# Altium PCB PCB.PcbDoc
Units mm, origin at the board's own origin, x right, y up, seen from the top; angles counter-clockwise.
Board outline 140.25 x 80.25 mm, 2 copper layers (Top Layer, Bottom Layer); 46 components, 44 nets, 145 pads, 16 vias.
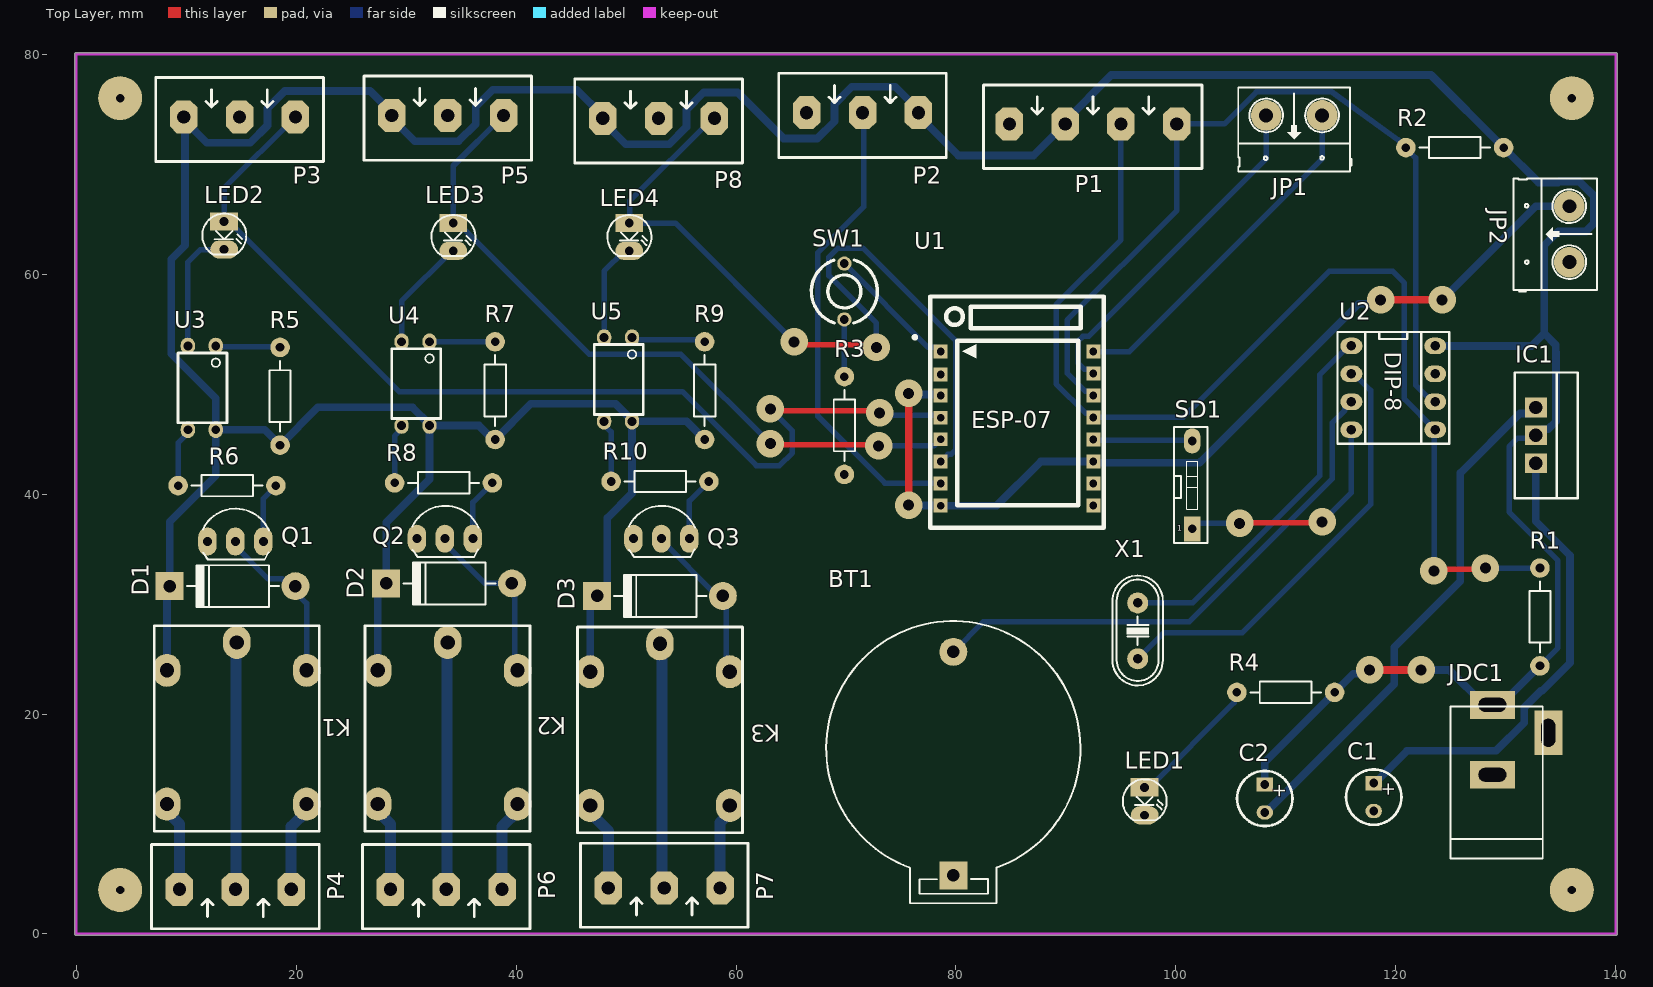
[diagram p0: Top Layer view]
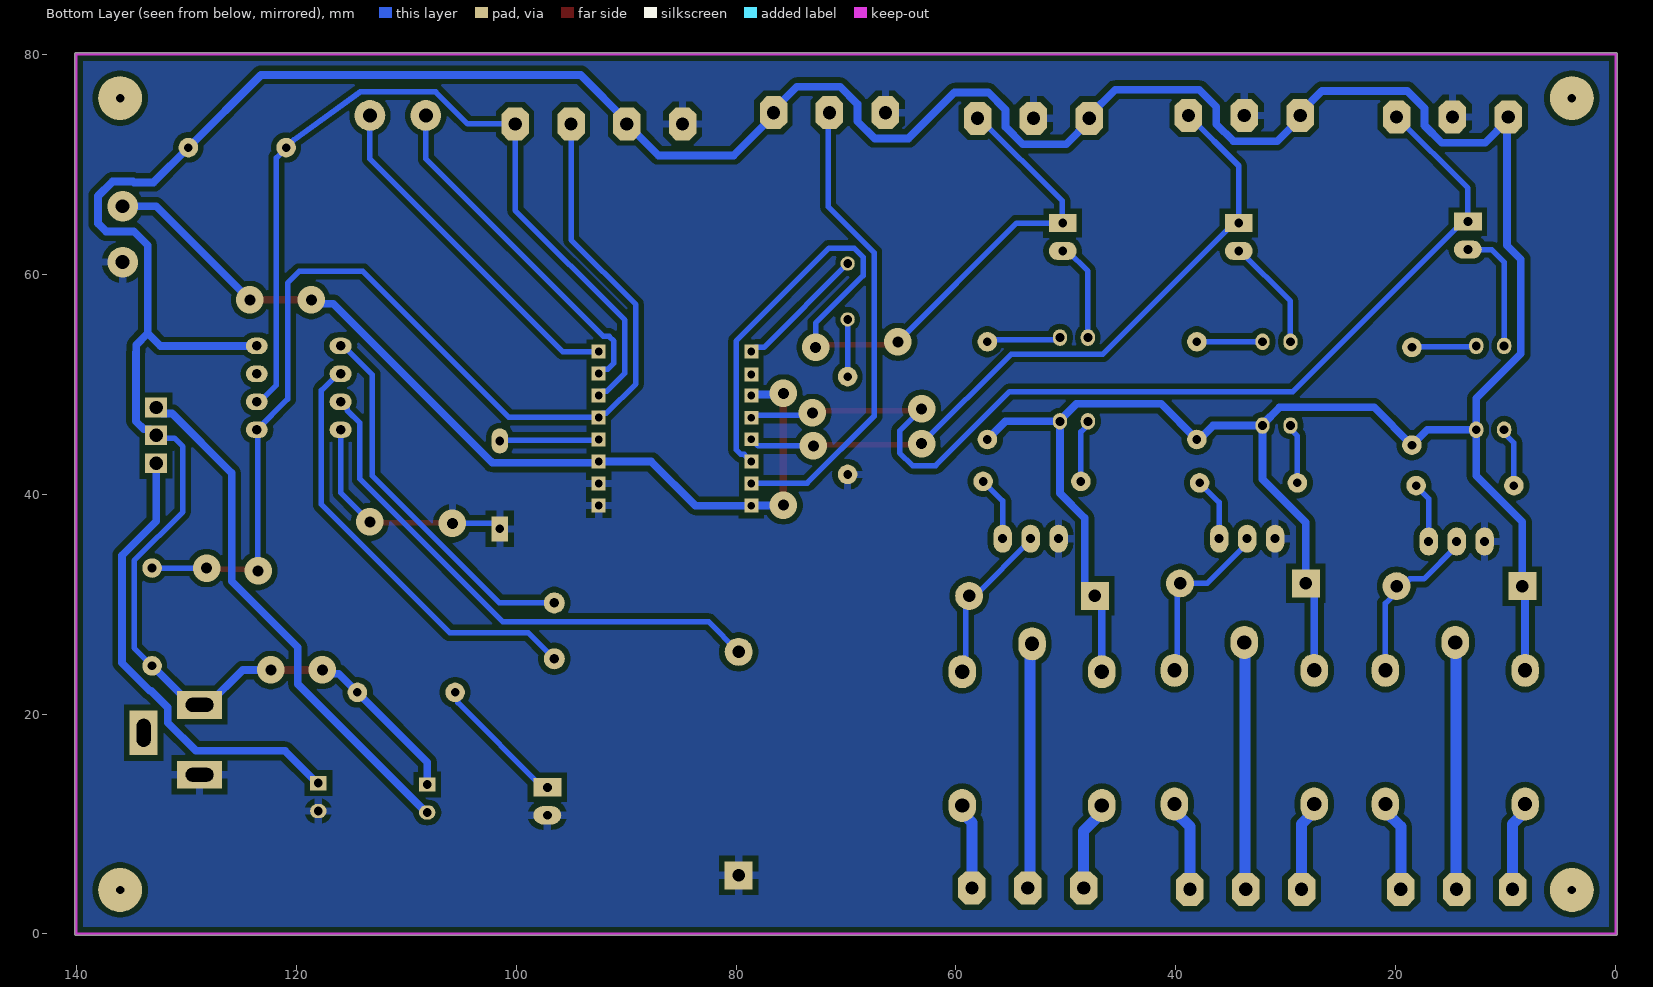
[diagram p1: Bottom Layer view, seen from below]

## Layer stack, top to bottom
Top Solder: solder mask 0.0102, Solder Resist, Dk 3.5
Top Layer: signal copper 0.0356
Dielectric 1: dielectric 0.32, FR-4, Dk 4.8
Bottom Layer: signal copper 0.0356
Bottom Solder: solder mask 0.0102, Solder Resist, Dk 3.5

## Board outline
-0.127,0 ccw(c0,0) 0,-0.127 140,-0.127 ccw(c140,0) 140.127,0 140.127,80 ccw(c140,80) 140,80.127 0,80.127 ccw(c0,80) -0.127,80

## Design rules (kind name [scope] priority, off if disabled: settings)
Clearance [All] p1: gap=0.5 ignorepadtopadclearanceinfootprint=FALSE
PolygonConnect [All] p1: connectstyle=Relief reliefconductorwidth=0.7 reliefentries=4 polygonreliefangle="90 Angle" airgapwidth=0.5
RoutingVias [All] p1: holewidth=1 width=2.5 viastyle="Through Hole" minholewidth=1 minwidth=2.5 maxholewidth=1 maxwidth=2.5
SolderMaskExpansion [All] p1: expansion=0.102 istentingtop=FALSE
UnRoutedNet [All] p1 off:
Width [All] p1: maxlimit=1 minlimit=0.5 preferedwidth=0.7
29 further rules are at their usual default settings.

## Components (designator, comment, footprint, x,y, rotation, side; value= is the part's Value field where it differs from the comment)
BT1 "PIN 3V" PIN3V 79.756,5.334 r90 top
C1 "Cap Pol 5mm" C5mm 117.983,12.446 r270 top
C2 "Cap Pol 5mm" C5mm 108.077,12.319 r270 top
D1 "1N4007" D2A 8.509,31.623 r0 top
D2 "1N4007" D2A 28.194,31.877 r0 top
D3 "1N4007" D2A 47.371,30.734 r0 top
IC1 "LM317" TO-220 132.715,45.339 r270 top
JDC1 "Jac DC" DC-IN 131.318,17.653 r90 top
JP1 "Header 2_1" HED2 113.284,74.422 r180 top value="Header 2"
JP2 "Header 2_1" HED2 135.763,61.087 r90 top value="Header 2"
K1 "Relay-SPDT" RELAY5PIN-10A 14.605,26.511 r180 top
K2 "Relay-SPDT" RELAY5PIN-10A 33.782,26.511 r180 top
K3 "Relay-SPDT" RELAY5PIN-10A 53.086,26.384 r180 top
LED1 "LED" LED-3 97.155,13.335 r270 top value="LED 3 ly Single Colour"
LED2 "LED" LED-3 13.462,64.77 r270 top value="LED 3 ly Single Colour"
LED3 "LED" LED-3 34.29,64.643 r270 top value="LED 3 ly Single Colour"
LED4 "LED" LED-3 50.292,64.643 r270 top value="LED 3 ly Single Colour"
P1 "Header 4 - M" "Medium - Header 4" 100.076,73.66 r180 top
P2 "Header 3 - M" "Medium - Header 3" 76.581,74.676 r180 top
P3 "Header 3 - M" "Medium - Header 3" 19.939,74.295 r180 top
P4 "Header 3 - M" "Medium - Header 3" 9.398,4.064 r0 top
P5 "Header 3 - M" "Medium - Header 3" 38.862,74.422 r180 top
P6 "Header 3 - M" "Medium - Header 3" 28.575,4.064 r0 top
P7 "Header 3 - M" "Medium - Header 3" 48.387,4.191 r0 top
P8 "Header 3 - M" "Medium - Header 3" 58.039,74.168 r180 top
Q1 "C1815" QTO-92 14.478,35.687 r0 top
Q2 "C1815" QTO-92 33.528,35.941 r0 top
Q3 "C1815" QTO-92 53.213,35.941 r0 top
R1 "2.2k" R1/4W 133.096,24.384 r90 top value="R1/4W - 1K"
R2 "2.2k" R1/4W 120.904,71.501 r0 top value="R1/4W - 1K"
R3 "1k" R1/4W 69.85,41.783 r90 top value="R1/4W - 1K"
R4 "1k" R1/4W 114.427,21.971 r180 top value="R1/4W - 1K"
R5 "1k" R1/4W 18.542,44.45 r90 top value="R1/4W - 1K"
R6 "1k" R1/4W 9.271,40.767 r0 top value="R1/4W - 1K"
R7 "1k" R1/4W 38.1,44.958 r90 top value="R1/4W - 1K"
R8 "1k" R1/4W 28.956,41.021 r0 top value="R1/4W - 1K"
R9 "1k" R1/4W 57.15,44.958 r90 top value="R1/4W - 1K"
R10 "1k" R1/4W 48.641,41.148 r0 top value="R1/4W - 1K"
SD1 "SW - DIP2" DIP2/W0.3K 101.473,36.83 r0 top
SW1 "SW" "BUTTON 2PIN TRON" 69.85,55.88 r90 top value="SW chip 2 pin"
U1 "ESP 12" ESP12_small 85.523,47.46 r0 top
U2 "DS1307" DIP.100/8/W.300/L.400 119.761,49.657 r270 top
U3 "Opto Isolator" PhotoCoupler 12.7,53.467 r180 top
U4 "Opto Isolator" PhotoCoupler 32.131,53.848 r180 top
U5 "Opto Isolator" PhotoCoupler 50.546,54.229 r180 top
X1 "4Mhz" XT2 96.52,27.559 r270 top

## Footprints (in the part's own frame and the unit in brackets; to place one, negate y for a bottom-side part, rotate by r counter-clockwise, add the part's x,y. Pads: shape width x height; smd on the part's side, far side on the other; paste and mask are expansions set on the pad)
"BUTTON 2PIN TRON" [mm] "PIN TO PIN 5.08, W=6MM"
  round 1.3 hole 0.8: 1(0,0) 2(5.08,0)
  silkscreen extent -0.33,-3 5.4,3, body extent -0.74,-3.02 5.72,3.18, height 4.4
C5mm [mm]
  rect 1.3x1.5 hole 0.8: 1(-1.27,0)
  oval 1.3x1.5 hole 0.8: 2(1.27,0)
  silkscreen extent -2.51,-2.51 2.51,2.51, body extent -2.5,-2.5 2.49,2.5, height 11.01
D2A [mil] "Diode 2A, W 150mil, L 450mil"
  round 100 hole 45: 1(450,0)
  rect 100x100 hole 45: 2(0,0)
  silkscreen extent 61,-75 391,75, body extent 5,-47 435,54, height 100
DC-IN [mil] "Jac DC input"
  rect 100x160 hole 50 slot 100 at 90 deg: 1(125,100) 2(-125,100)
  rect 160x100 hole 50 slot 100 at 0 deg: 3(25,-100)
  silkscreen extent -425,-80 120,250, body extent -410,-105 134,269, height 434
DIP2/W0.3K [mil] "2 PIN, W 200mil , L 450mil,Pin to pin 100mil"
  rect 60x90 hole 31: 1(0,0)
  oval 60x90 hole 31: 2(0,315)
  silkscreen extent -65,-50 55,365, body extent -73,-52 65,362, height 130
DIP.100/8/W.300/L.400 [mm]
  oval 1.5x2 hole 0.864: 1(-3.81,-3.81) 2(-1.27,-3.81) 3(1.27,-3.81) 4(3.81,-3.81) 5(3.81,3.81) 6(1.27,3.81) 7(-1.27,3.81) 8(-3.81,3.81)
  silkscreen extent -5.08,-5.08 5.08,5.08, body extent -5.4,-3.88 5.4,3.88, height 4.5
ESP12_small [mm]
  rect 1.27x1.27 hole 0.71: 1(-6.91,5.499) 2(-6.91,3.416) 3(-6.91,1.511) 4(-6.91,-0.521) 5(-6.91,-2.476) 6(-6.91,-4.508) 7(-6.91,-6.49) 8(-6.91,-8.522) 9(6.963,-8.496) 10(6.963,-6.49) 11(6.963,-4.508) 12(6.963,-2.502) 13(6.963,-0.495) 14(6.963,1.511) 15(6.963,3.492) 16(6.963,5.499)
  silkscreen extent -9.41,-10.5 7.92,10.5, body extent -8.12,-9.97 8.13,14.03, height 9
HED2 [mil] "Header 2, 2 pin, hight 300mil, Pin to Pin 200, Colour Green"
  round 110 hole 50: 1(0,0) 2(200,0)
  silkscreen extent -106,-100 300,200, body extent -92,-90 302,205, height 394
LED-3 [mil] "LED 2 PIN, 3ly Only colour"
  rect 65x100 hole 32: 1(0,0)
  oval 65x100 hole 32: 2(100,0)
  silkscreen extent -29,-78 118,79, body extent -29,-75 109,75, height 256
"Medium - Header 3" [mm]
  oct 2.5x3 hole 1.2: 1(0,0) 2(5.08,0) 3(10.16,0)
  silkscreen extent -2.54,-3.58 12.7,4.06, body extent -2.42,-3.51 12.58,3.99, height 10
"Medium - Header 4" [mm]
  oct 2.5x3 hole 1.2: 1(0,0) 2(5.08,0) 3(10.147,0) 4(15.215,0)
  silkscreen extent -2.29,-3.53 17.58,4.06, body extent -2.36,-3.43 17.64,4.07, height 10
PhotoCoupler [mm] "Opto quang"
  oval 1.3x1.5 hole 0.8: 1(0,0) 2(2.54,0) 3(2.54,7.62) 4(0,7.62)
  silkscreen extent -1.02,0.63 3.43,6.98, body extent -1.53,-0.19 4.01,7.81, height 4.31
PIN3V [mil] "Socket PIN 3V"
  rect 100x100 hole 45: 1(0,0)
  round 100 hole 45: 2(800,0)
  silkscreen extent -100,-455 910,455, body extent -128,-447 1002,449, height 278
QTO-92 [mil] "TO-92"
  oval 66x100 hole 32: 1(-100,0) 2(0,0) 3(100,0)
  silkscreen extent -117,-65 120,118, body extent -109,-66 109,95, height 245
R1/4W [mil] "R 1/4W, 2 Pin, 350mil"
  round 70 hole 31: 1(0,0) 2(350,0)
  silkscreen extent 48,-38 302,38, body extent -40,-47 386,47, height 111
RELAY5PIN-10A [mm]
  oval 2.5x3 hole 1.3: 1(0,0) 2(-6.35,14.7) 3(6.35,14.7) 4(-6.35,2.54) 5(6.35,2.54)
  silkscreen extent -7.49,-1.52 7.51,17.18, body extent -7.49,-1.52 7.49,17.15, height 16
TO-220 [mm]
  rect 1.8x2 hole 1.2: 1(-2.54,0) 2(0,0) 3(2.54,0)
  silkscreen extent -5.72,-1.91 5.71,3.81, body extent -4.92,-2.13 4.98,2.37, height 8.08
XT2 [mil] "Footpin for Crystal 2 pin"
  round 75 hole 34: 1(-100,0) 2(100,0)
  silkscreen extent -198,-90 195,90, body extent -233,-93 213,90, height 138

## Part data
BT1: "Battery 3VDC"
C1 C2: "Polarized Capacitor (Axial)", LatestRevisionDate=17-Jul-2002, LatestRevisionNote="Re-released for DXP Platform.", PackageReference=POLAR0.8, Published=8-Jun-2000, Publisher="Altium Limited"
D1 D2 D3: library part D1A, "Diode 1A"
IC1: library part LM317_1, Contact Email=bien-nb@thanglongie.com, Creator="Nguyen Ba Bien"
JDC1: library part DCIN, "Jac DC input"
JP1 JP2: "Header, 2-Pin", Manufacturer="Generic Components", Class=Connector
K1 K2 K3: "Single-Pole Dual-Throw Relay", LatestRevisionDate=17-Jul-2002, LatestRevisionNote="Re-released for DXP Platform.", PackageReference=MODULE5B, Published=24-Mar-1999, Publisher="Altium Limited"
LED1 LED2 LED3 LED4: "LED Single colour Green and Red"
P1 P2 P3 P4 P5 P6 P7 P8: "Header, 3-Pin, Medium", LatestRevisionDate=17-Jul-2002, LatestRevisionNote="Re-released for DXP Platform.", Publisher="Altium Limited"
Q1 Q2 Q3: "NPN 600mW, ECB"
R1 R2 R3 R4 R5 R6 R7 R8 R9 R10: library part R1/4W, "Resistor 1/4W"
SD1: library part SWDIP-1, "DIP Switch, 2 Position, SPST"
SW1: library part SW2, "Switch button 2 pin"
U1: library part ESP_12, "ESP-12 Wi-Fi Module by AI-Thinker", IC=ESP8266-EX, Vendor=Ai-thinker
U2: "64 X 8 Serial Real-Time Clock"
U3 U4 U5: "4-Pin Phototransistor Optocoupler", DatasheetDocument=Nov-2003, LatestRevisionDate=04-Mar-2005, LatestRevisionNote="Sch pins 3 & 4 Swapped.", PackageReference=DIP-4, Published=24-Mar-1999, Publisher="Altium Limited"
X1: library part XT2, "Crystal For all Crystal 2pin."

## Free pads (board coordinates)
  round 4 hole 0.762: 19(4,4) 20(136,4) 21(136,76) 22(4,76)

## Via types
v1: diameter 2.5, hole 1, Top Layer to Bottom Layer, 16 vias

## Nets (pads, with @x,y where several pads share a name; then routed paths per layer and width w, separated by ;. In a path a pad name is that pad's centre, name@x,y a point inside that pad or via, vN(x,y) a via of type N, cw(c..) or ccw(c..) an arc to the next point about the centre after c; other vN are vias at no path point)
3.3: C1.1 IC1.3 | length 42.6
  Bottom Layer w0.7: C1.1 118.083,13.716 121.017,16.65 129.104,16.65 131.66,19.206 131.66,20.594 133.195,22.129 133.3,22.129 135.835,24.664 135.835,34.409 132.715,37.529 IC1.3
CB: K1.3 P4.1 | length 8.2
  Bottom Layer w1: K1.3 8.255,11.155 9.398,10.012 P4.1
CB1: K3.3 P7.1 | length 8.2
  Bottom Layer w1: K3.3 46.736,11.028 48.387,9.377 P7.1
CB2: K2.3 P6.1 | length 8.2
  Bottom Layer w1: K2.3 27.432,11.155 28.575,10.012 P6.1
CK: K1.2 P4.3 | length 8.3
  Bottom Layer w1: P4.3 19.558,9.758 20.955,11.155 K1.2
CK1: K3.2 P7.3 | length 7.9
  Bottom Layer w1: P7.3 58.547,10.139 59.436,11.028 K3.2
CK2: K2.2 P6.3 | length 8.3
  Bottom Layer w1: P6.3 38.735,9.758 40.132,11.155 K2.2
COM: K1.1 P4.2 | length 22.5
  Bottom Layer w1: P4.2 14.541,4.127 14.541,26.447 K1.1
COM1: K3.1 P7.2 | length 22.4
  Bottom Layer w1: K3.1 53.276,26.193 53.276,4.381 P7.2
COM2: K2.1 P6.2 | length 22.5
  Bottom Layer w1: P6.2 33.718,4.127 33.718,26.447 K2.1
Ctrl_relay1: LED2.1 P3.1 U1.4 | length 94.2
  Top Layer w0.5: v1(63.119,47.752) 63.307,47.564 72.862,47.564 v1(73.05,47.375)
  Bottom Layer w0.5: P3.1 13.462,67.818 LED2.1 13.906,64.77 29.368,49.309 55.117,49.309 61.849,42.577 63.947,42.577 65.119,43.749 65.119,45.752 v1(63.119,47.752) ; v1(73.05,47.375) 73.277,47.149 78.403,47.149 U1.4
Ctrl_relay2: LED3.1 P5.1 U1.5 | length 64.6
  Top Layer w0.5: v1(63.119,44.577) 63.219,44.477 72.875,44.477 v1(72.976,44.376)
  Bottom Layer w0.5: P5.1 34.29,69.85 LED3.1 34.734,64.643 46.648,52.729 54.967,52.729 v1(63.119,44.577) ; v1(72.976,44.376) 72.981,44.371 78.001,44.371 U1.5
Ctrl_relay3: LED4.1 P8.1 U1.6 | length 77.1
  Top Layer w0.5: v1(65.278,53.848) 65.532,53.594 72.517,53.594 v1(72.771,53.34)
  Bottom Layer w0.5: P8.1 57.842,74.168 50.336,66.662 50.336,64.687 LED4.1 54.483,64.643 v1(65.278,53.848) ; v1(72.771,53.34) 72.771,55.55 68.45,59.871 68.45,61.54 69.27,62.36 71.543,62.36 79.998,53.905 79.998,44.038 79.559,43.598 79.26,43.598 U1.6
GND: BT1.1 C1.2 JDC1.2 JP2.1 LED1.2 P1.4 P2.3 P3.2 P5.2 P8.2 Q1.1 Q2.1 Q3.1 R3.1 SD1.1 U1.9 U1.10 U2.4 | length 21.6
  Top Layer w0.5: v1(105.791,37.338) 105.855,37.401 113.221,37.401 v1(113.284,37.465)
  Bottom Layer w0.5: SD1.1 101.981,37.338 v1(105.791,37.338) ; v1(113.284,37.465) 115.951,40.132 U2.4
NetBT1_2: BT1.2 U2.3 | length 48.7
  Bottom Layer w0.5: BT1.2 82.499,28.397 101.219,28.397 114.201,41.378 114.201,46.468 115.35,47.617 115.35,47.765 115.951,48.366 U2.3
NetC2_2: C2.2 IC1.1 | length 47.6
  Bottom Layer w0.7: C2.2 108.177,11.049 119.858,22.73 119.858,26.084 125.857,32.082 125.857,41.907 131.279,47.329 132.165,47.329 IC1.1
NetD1_1: D1.1 K1.4 Q1.2 | length 15.5
  Bottom Layer w0.5: Q1.2 14.478,35.255 17.456,32.277 18.733,32.277 19.387,31.623 D1.1 19.939,31.071 20.955,30.055 K1.4
NetD2_1: D2.1 K2.4 Q2.2 | length 16.1
  Bottom Layer w0.5: Q2.2 33.528,35.509 37.16,31.877 D2.1 39.878,31.623 39.878,24.225 K2.4
NetD3_1: D3.1 K3.4 Q3.2 | length 15
  Bottom Layer w0.5: Q3.2 53.213,35.803 58.282,30.734 D3.1 59.118,30.416 59.118,24.161 K3.4
NetJP1_1: JP1.1 U1.16 | length 32
  Bottom Layer w0.5: U1.16 95.758,52.959 113.284,70.485 JP1.1
NetJP1_2: JP1.2 U1.15 | length 31.7
  Bottom Layer w0.5: U1.15 92.101,51.337 91.665,51.337 91.101,51.901 91.101,53.905 91.54,54.344 92.063,54.344 108.204,70.485 JP1.2
NetJP2_2: JP2.2 U1.3 U1.8 U1.11 | length 84.6
  Top Layer w0.7: v1(75.692,38.989) v1(75.692,49.149) ; v1(118.618,57.658) v1(124.206,57.658)
  Bottom Layer w0.7: v1(75.692,38.989) 75.717,38.964 78.588,38.964 U1.8 83.685,38.938 87.699,42.951 U1.11 92.599,42.838 102.141,42.838 102.254,42.951 102.26,42.951 116.623,57.314 118.274,57.314 v1(118.618,57.658) ; v1(75.692,49.149) 75.781,49.06 78.524,49.06 U1.3 ; v1(124.206,57.658) 132.715,66.167 JP2.2
NetLED1_1: LED1.1 R4.2 | length 12.4
  Bottom Layer w0.5: LED1.1 97.599,13.335 105.292,21.028 105.292,21.726 R4.2
NetLED2_2: LED2.2 U3.2 | length 11.4
  Bottom Layer w0.5: U3.2 10.16,61.087 11.303,62.23 LED2.2
NetLED3_2: LED3.2 U4.2 | length 10.3
  Bottom Layer w0.5: U4.2 29.591,57.537 34.157,62.103 LED3.2
NetLED4_2: LED4.2 U5.2 | length 9.1
  Bottom Layer w0.5: U5.2 48.006,60.261 49.847,62.103 LED4.2
NetQ1_3: Q1.3 R6.2 | length 5.6
  Bottom Layer w0.5: Q1.3 17.018,39.592 18.161,40.735 R6.2
NetQ2_3: Q2.3 R8.2 | length 5.8
  Bottom Layer w0.5: Q2.3 36.068,39.243 R8.2
NetQ3_3: Q3.3 R10.2 | length 5.9
  Bottom Layer w0.5: Q3.3 55.753,39.37 R10.2
NetR3_2: R3.2 SW1.1 | length 5.2
  Bottom Layer w0.5: R3.2 SW1.1
NetR5_2: R5.2 U3.1 | length 5.9
  Bottom Layer w0.5: U3.1 12.763,53.404 18.479,53.404 R5.2
NetR6_1: R6.1 U3.3 | length 5.4
  Bottom Layer w0.5: R6.1 9.271,44.656 10.16,45.545 U3.3
NetR7_2: R7.2 U4.1 | length 6
  Bottom Layer w0.5: U4.1 R7.2
NetR8_1: R8.1 U4.3 | length 5.5
  Bottom Layer w0.5: R8.1 28.956,45.277 29.591,45.912 U4.3
NetR9_2: R9.2 U5.1 | length 6.8
  Bottom Layer w0.5: U5.1 50.736,54.038 56.959,54.038 R9.2
NetR10_1: R10.1 U5.3 | length 5.7
  Bottom Layer w0.5: U5.3 48.006,46.293 48.641,45.658 R10.1
NetSD1_2: SD1.2 U1.12 | length 9
  Bottom Layer w0.5: U1.12 92.55,44.895 101.409,44.895 SD1.2
NetSW1_2: SW1.2 U1.1 | length 12.1
  Bottom Layer w0.5: SW1.2 77.466,53.344 78.228,53.344 U1.1
NetU2_1: U2.1 X1.1 | length 34.5
  Bottom Layer w0.5: X1.1 101.507,30.099 113.094,41.686 113.094,50.86 115.701,53.467 U2.1
NetU2_2: U2.2 X1.2 | length 39.7
  Bottom Layer w0.5: X1.2 98.898,27.397 106.044,27.397 117.701,39.054 117.701,49.427 116.201,50.927 U2.2
OUT: P2.2 U1.7 | length 44
  Bottom Layer w0.5: P2.2@71.628,75.692 71.628,66.132 67.45,61.954 67.45,47.074 73.535,40.989 78.594,40.989 U1.7
SCL: P1.1 R2.1 U1.14 U2.6 | length 78.1
  Bottom Layer w0.5: U1.14 92.101,49.356 91.741,49.356 90.101,50.996 90.101,55.811 100.076,65.786 P1.1 104.199,73.66 104.406,73.66 107.315,76.569 112.815,76.569 112.845,76.6 113.189,76.6 114.104,76.6 120.175,72.23 120.203,72.202 R2.1 120.904,71.458 121.793,70.569 121.793,49.915 123.321,48.387 U2.6
SDA: P1.2 R1.2 U1.13 U2.5 | length 102.1
  Top Layer w0.5: v1(123.444,33.02) 123.571,33.147 128.016,33.147 v1(128.143,33.274)
  Bottom Layer w0.5: P1.2 94.996,63.118 89.101,57.223 89.101,50.026 91.777,47.35 92.101,47.35 U1.13 100.653,46.965 113.93,60.242 119.717,60.242 120.777,59.182 120.777,48.641 U2.5 123.507,45.783 123.507,33.084 v1(123.444,33.02) ; v1(128.143,33.274) R1.2
VCC: C2.1 D1.2 D2.2 D3.2 IC1.2 JDC1.1 K1.5 K2.5 K3.5 P1.3 P2.1 P3.3 P5.3 P8.3 R1.1 R2.2 R4.1 R5.1 R7.1 R9.1 U2.8 U3.4 U4.4 U5.4 | length 407.6
  Top Layer w0.7: v1(117.602,24.003) v1(122.301,24.003)
  Bottom Layer w0.5: IC1.2 132.461,45.085 131.064,45.085 130.302,44.323 130.302,38.386 134.735,33.953 134.735,26.023 R1.1
  Bottom Layer w0.7: K1.5 8.255,31.369 D1.2 8.509,37.465 12.7,41.656 U3.4 ; P3.3 9.779,74.045 P3.3@9.906,73.918 ; P3.3@9.906,75.061 P3.3@9.906,73.918 ; K2.5 27.432,31.115 D2.2 28.194,37.413 32.131,41.35 U4.4 ; K3.5 46.736,30.099 D3.2 48.291,31.654 48.291,37.815 50.546,40.07 U5.4 ; R9.1 55.499,46.609 U5.4 ; C2.1 108.077,15.621 R4.1 116.115,23.659 117.258,23.659 v1(117.602,24.003) ; v1(122.301,24.003) 124.841,24.003 128.016,20.828 JDC1.1 129.54,20.828 R1.1 ; U2.8 132.334,53.467 133.477,54.61 ; IC1.2 133.265,45.889 133.827,45.889 134.565,46.627 134.565,52.887 134.532,52.92 134.532,53.555 133.477,54.61 ; P3.3@9.906,73.918 9.906,62.611 8.636,61.341 8.636,52.77 12.7,48.706 U3.4 ; P3.3@9.906,73.918 11.879,71.945 15.836,71.945 17.399,73.508 17.399,75.082 18.962,76.645 26.729,76.645 28.702,74.672 P5.3 28.702,74.172 30.802,72.072 34.759,72.072 36.322,73.635 36.322,75.209 37.885,76.772 45.525,76.772 47.879,74.418 P8.3 47.879,73.918 49.979,71.818 53.936,71.818 55.499,73.381 55.499,74.955 57.062,76.518 60.134,76.518 64.326,72.326 67.398,72.326 68.961,73.889 68.961,75.463 70.524,77.026 74.481,77.026 76.581,74.926 P2.1 76.581,74.426 80.219,70.788 87.056,70.788 P1.3 89.929,73.91 94.124,78.105 123.19,78.105 R2.2 132.969,68.326 134.744,68.326 134.832,68.414 136.694,68.414 138.01,67.098 138.01,64.604 137.287,63.881 134.747,63.881 133.477,62.611 133.477,54.61 ; U3.4 17.145,45.847 R5.1 21.971,47.879 30.58,47.879 32.131,46.328 U4.4 ; U4.4 36.628,46.228 37.898,44.958 R7.1 41.351,48.209 49.046,48.209 50.546,46.709 U5.4
pads on no net: JDC1.3 U1.2 U2.7

## Polygon pours and split planes (outlines as drawn)
GND on Bottom Layer "GND_L02_P000" (solid, pour order 0): 0,0 0,80.01 140.081,80.01 140.081,0

## Keep-outs
Keep-Out Layer:
  lines w0.254: 0,0 140,0 140,80 0,80 0,0

## Text inside footprints (layer, text, board x,y; h text height)
C1: Top Overlay "+" at 118.821,13.843 h1.2 r270
C2: Top Overlay "+" at 108.915,13.716 h1.2 r270
SD1: Top Overlay "1" at 100.101,36.678 h0.51
U1: Top Overlay "ESP-07" at 81.396,45.974 h1.52; Mechanical 4 ">VALUE" at 94.096,52.959 h0.04 r90; Mechanical 4 ">VALUE" at 94.096,50.952 h0.04 r90; Mechanical 4 ">VALUE" at 94.096,48.971 h0.04 r90; Mechanical 4 ">VALUE" at 94.096,46.965 h0.04 r90; Mechanical 4 ">VALUE" at 94.096,44.958 h0.04 r90; Mechanical 4 ">VALUE" at 94.096,42.951 h0.04 r90; Mechanical 4 ">VALUE" at 94.096,40.97 h0.04 r90; Mechanical 4 ">VALUE" at 94.096,38.964 h0.04 r90; Mechanical 4 ">VALUE" at 77.103,40.97 h0.04 r90; Mechanical 4 ">VALUE" at 77.103,42.951 h0.04 r90; Mechanical 4 ">VALUE" at 77.103,44.958 h0.04 r90; Mechanical 4 ">VALUE" at 77.103,46.965 h0.04 r90; Mechanical 4 ">VALUE" at 77.103,48.971 h0.04 r90; Mechanical 4 ">VALUE" at 77.103,50.952 h0.04 r90; Mechanical 4 ">VALUE" at 77.103,52.959 h0.04 r90; Mechanical 4 ">VALUE" at 77.154,52.934 h0.04 r90; Mechanical 4 ">VALUE" at 77.154,50.902 h0.04 r90; Mechanical 4 ">VALUE" at 77.128,40.97 h0.04 r90
U2: Top Overlay "DIP-8" at 118.999,52.959 h1.5 r270